# Altium PCB PCI Express_16765X11115_36PIN_Half length.PCBDOC
Units mm, origin at the board's own origin, x right, y up, seen from the top; angles counter-clockwise.
Board outline 167.65 x 111.15 mm, 4 copper layers (TopLayer, InternalPlane1, InternalPlane2, BottomLayer); 1 components, 21 nets, 38 pads, 0 vias.
Unrouted connection lines stored in the file: 14.
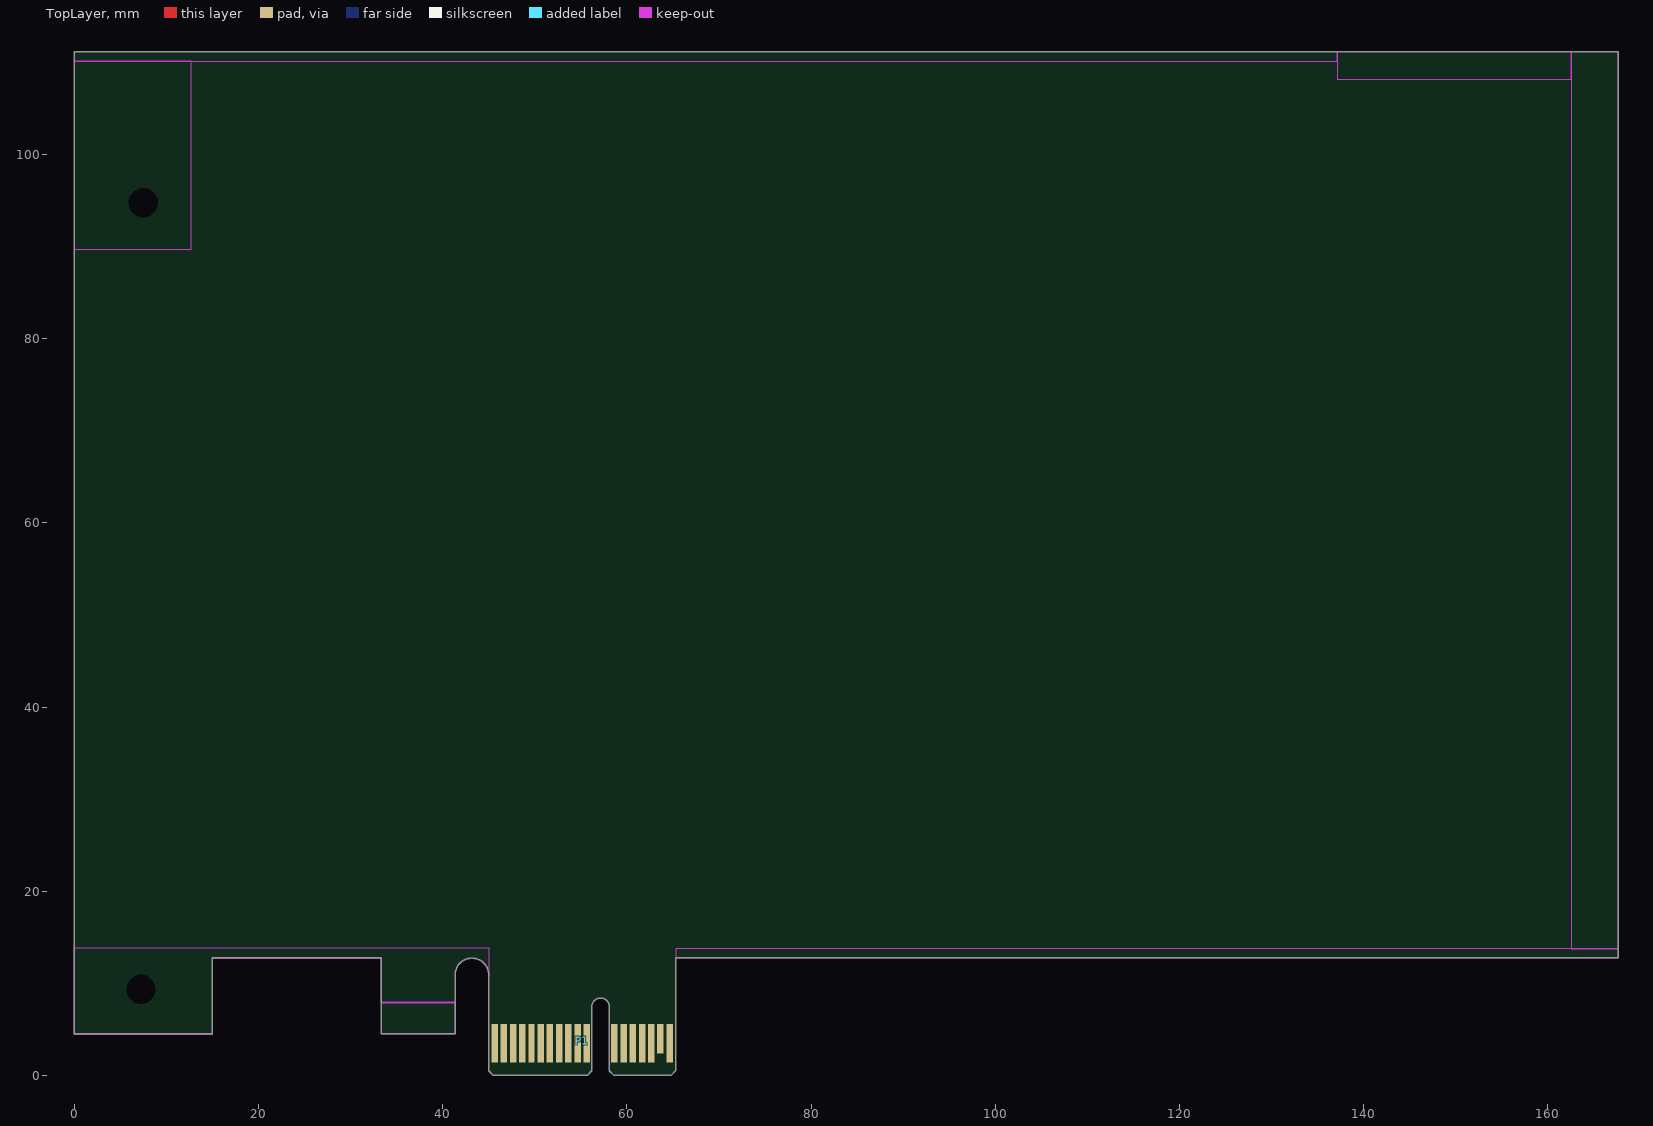
[diagram p0: TopLayer view]
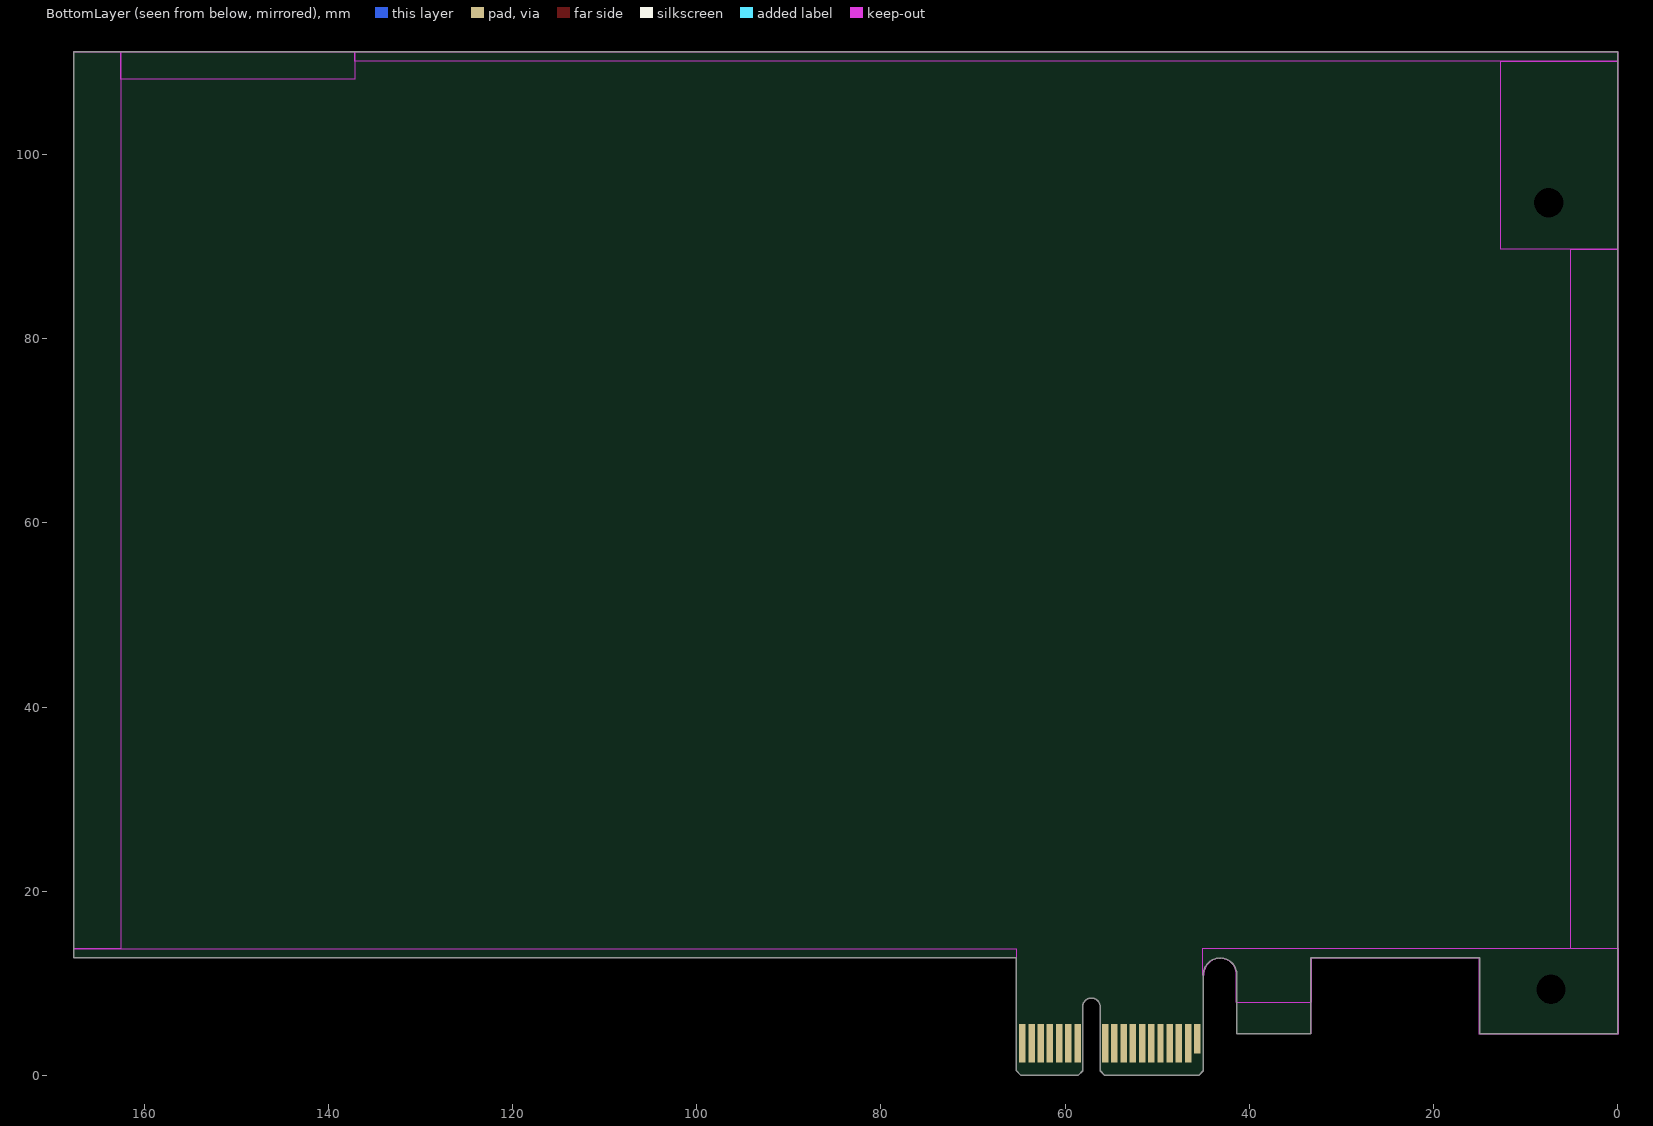
[diagram p1: BottomLayer view, seen from below]
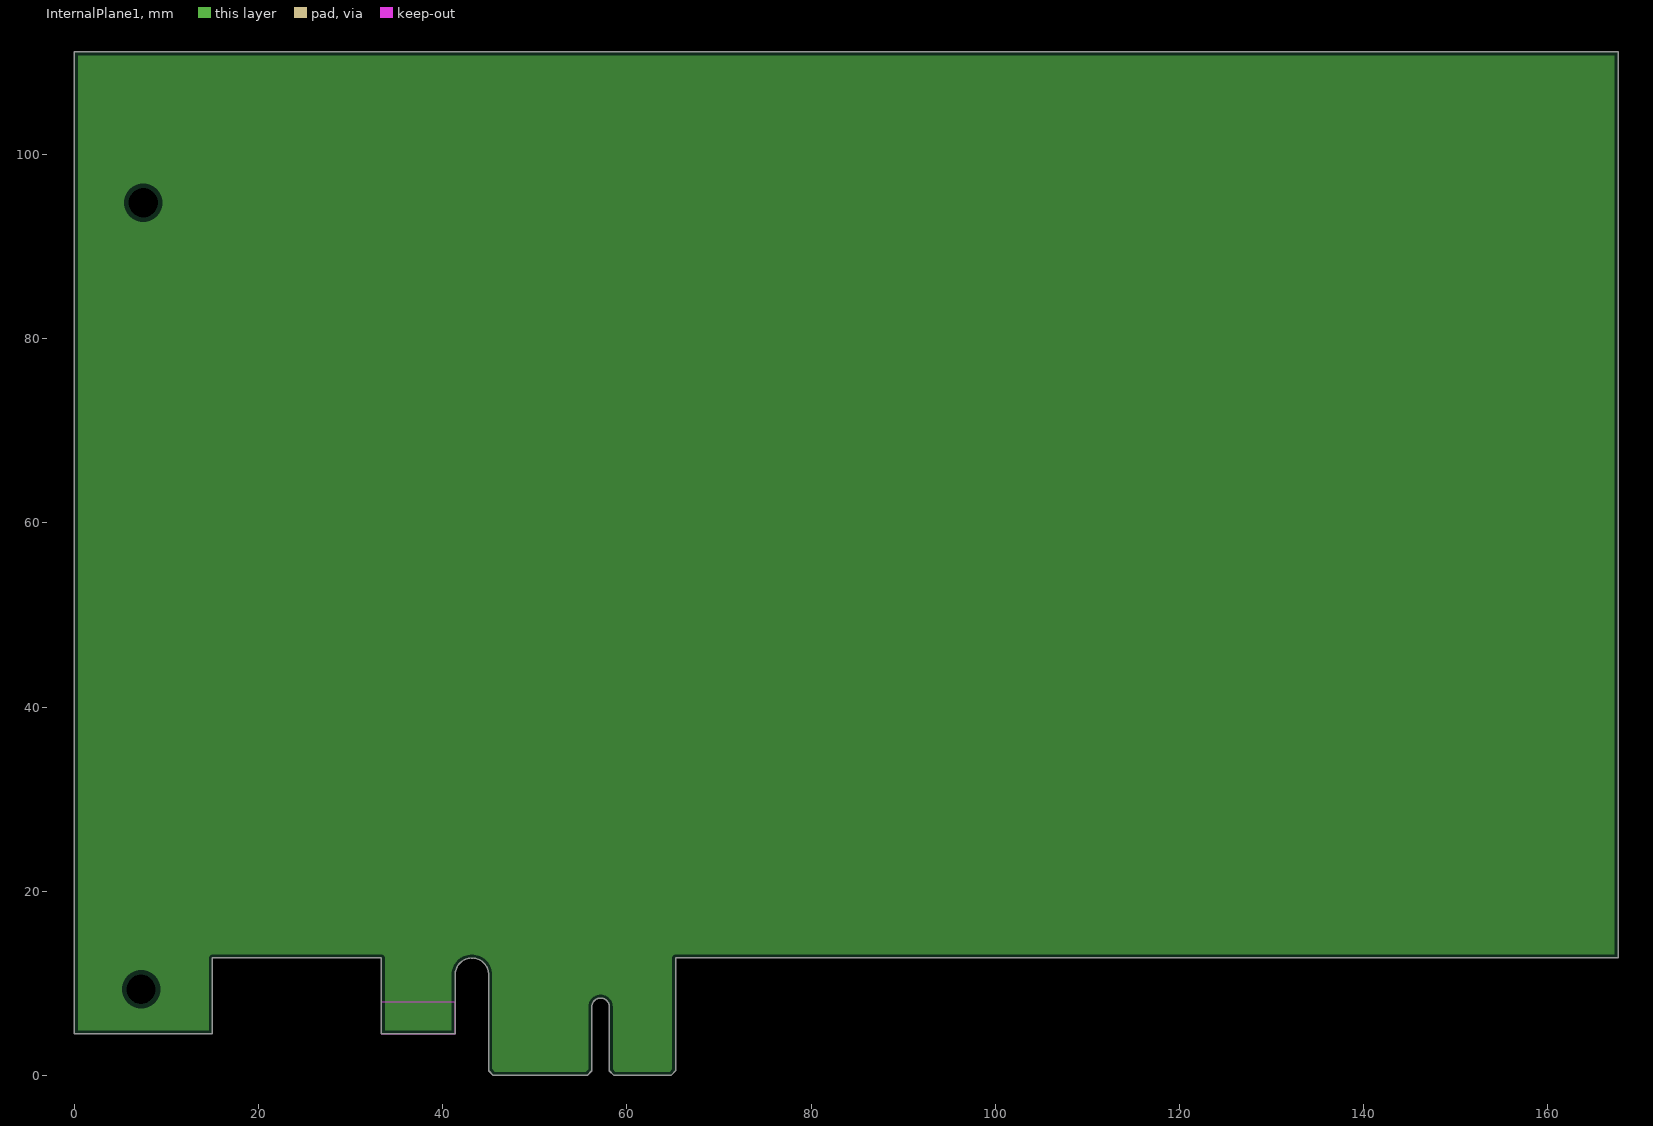
[diagram p2: InternalPlane1, clearances drawn from the general rule]
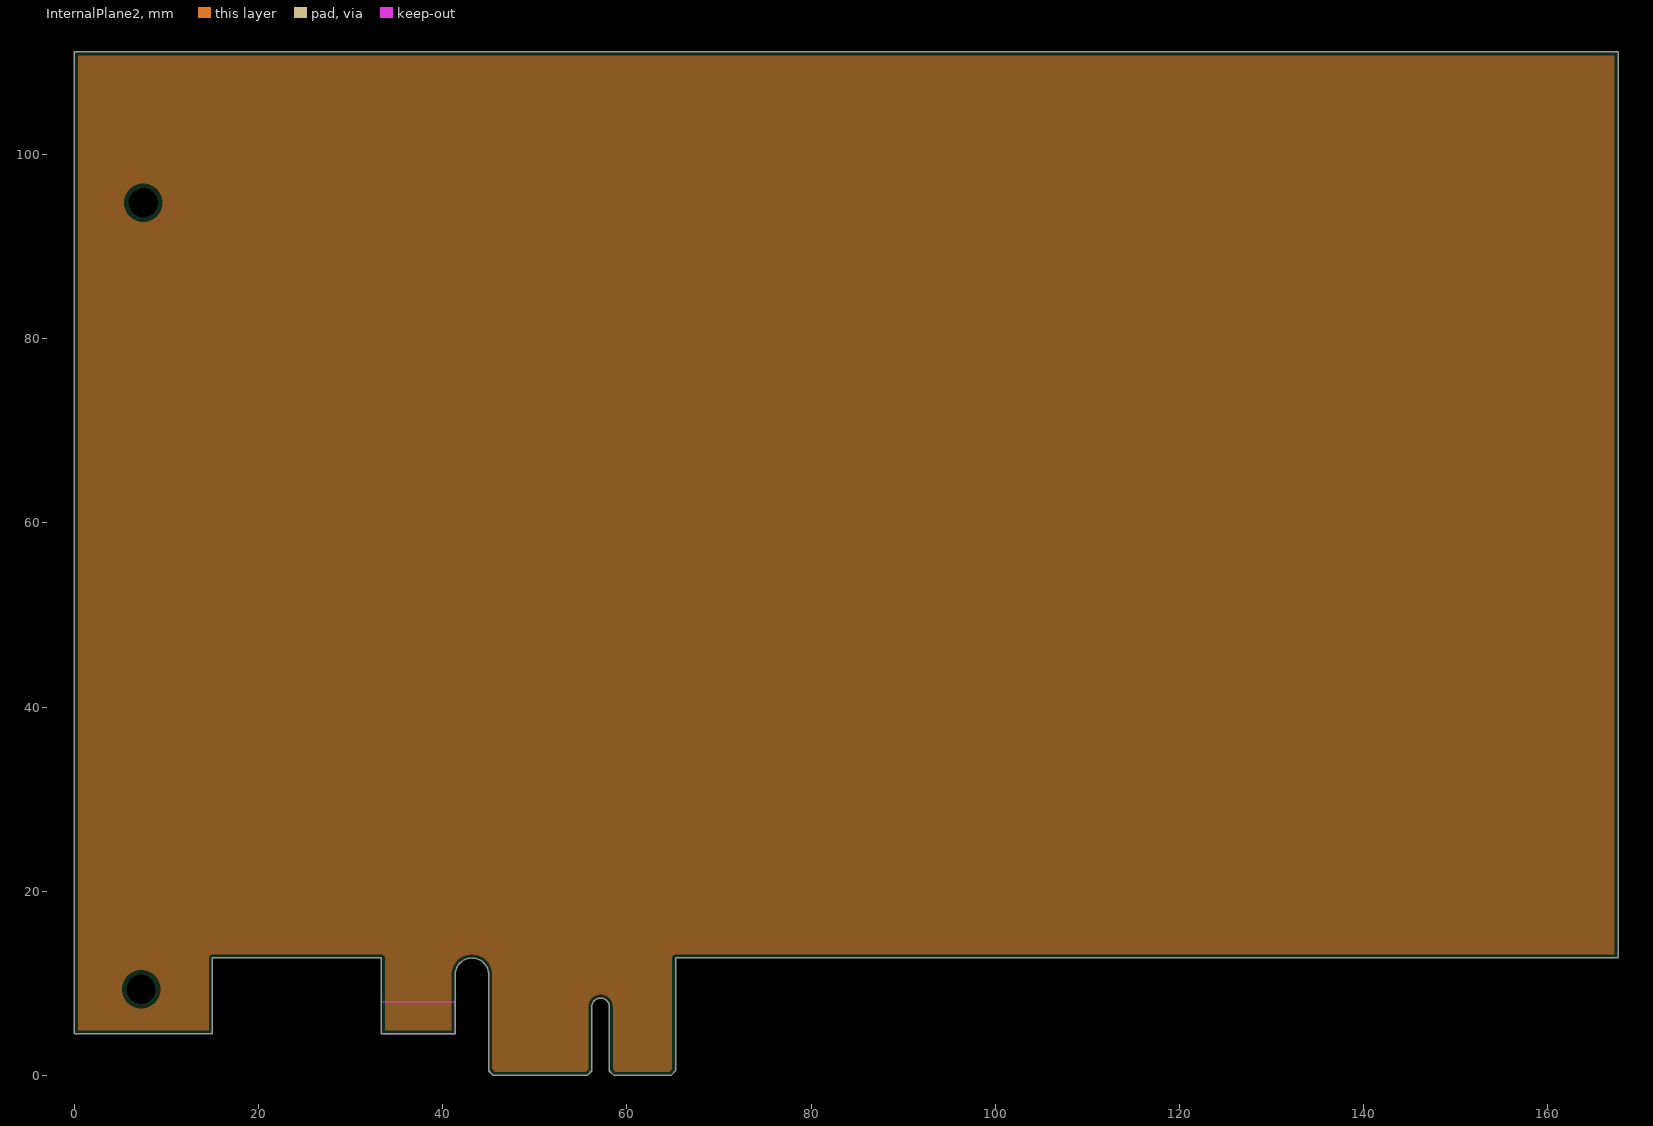
[diagram p3: InternalPlane2, clearances drawn from the general rule]

## Layer stack, top to bottom
TopLayer: signal copper 0.0178
Dielectric: core 0.32, FR-4, Dk 4.8
InternalPlane1: plane copper 0.0356
Dielectric: prepreg 0.32, FR-4, Dk 4.8
InternalPlane2: plane copper 0.0356
Dielectric: core 0.32, FR-4, Dk 4.8
BottomLayer: signal copper 0.0178

## Board outline
0,4.5 15,4.5 15,12.75 33.35,12.75 33.35,4.5 41.35,4.5 41.35,10.925 cw(c43.175,10.925) 45,10.925 45,0.5 45.5,0 55.7,0 56.2,0.5 56.2,7.45 cw(c57.15,7.45) 58.1,7.45 58.1,0.5 58.6,0 64.8,0 65.3,0.5 65.3,12.75 167.65,12.75 167.65,111.15 0,111.15

## Design rules (kind name [scope] priority, off if disabled: settings)
Clearance [All] p1: gap=0.254
DiffPairsRouting [All] p1: maxlimit=0.254 minlimit=0.254 mostfreqgap=0.254 maxuncoupledlength=12.7
FabricationTestPointUsage TestPointUsage [All] p1: valid=0 allowmultiple=FALSE
FabricationTestpoint Testpoint [All] p1: side=3 testpointundercomponent=TRUE minsize=1.016 maxsize=2.54 preferedsize=1.524 minholesize=0.508 maxholesize=1.016 preferedholesize=0.813 testpointgrid=0.025 allowsidetop=TRUE allowsidebottom=TRUE usegrid=TRUE gridtolerance=0
Height "PCI Express, Page 84, \"Component Height Constraints\" for solder side" [OnBottomLayer] p1: minheight=0 maxheight=2.67 prefheight=2.67
Height "PCI Express, Page 84, \"Component Height Constraints\" for component side" [OnTopLayer] p2: minheight=0 maxheight=14.47 prefheight=14.47
PlaneClearance [All] p1: clearance=0.5
PlaneConnect [All] p1: planeconnectstyle=Relief reliefexpansion=0.508 reliefentries=4 reliefconductorwidth=0.254 reliefairgap=0.254
PolygonConnect [All] p1: connectstyle=Relief reliefconductorwidth=0.254 reliefentries=4 polygonreliefangle="90 Angle"
RoomDefinition "Component Free Area" [InAnyComponent] p1: confinementstyle=ConfineOut formatcopy=TRUE lockcomponents=FALSE outline 142.05,13.75 142.05,14.1 150.2,14.1 150.2,16.1 155.45,16.1 155.45,13.75
RoutingVias [All] p1: holewidth=0.711 width=1.27 viastyle="Through Hole" minholewidth=0.711 minwidth=1.27 maxholewidth=0.711 maxwidth=1.27
SilkscreenOverComponentPads [All] p1: minsilkscreentomaskgap=0.254
SolderMaskExpansion [All] p1: expansion=0
Width [All] p1: maxlimit=0.254 minlimit=0.254 preferedwidth=0.254
21 further rules are at their usual default settings.

## Classes and differential pairs
net class JTAG[1..5]: JTAG1 JTAG2 JTAG3 JTAG4 JTAG5
differential pair PER0: +PER0_P -PER0_N
differential pair PET0: +PET0_P -PET0_N

## Components (designator, comment, footprint, x,y, rotation, side; value= is the part's Value field where it differs from the comment)
P1 "PCIeX1-GF-2D-1000-1K-O36" PCIeX1-GF-2D-1000-1K-O36 55.15,3.5 r0 top locked

## Footprints (in the part's own frame and the unit in brackets; to place one, negate y for a bottom-side part, rotate by r counter-clockwise, add the part's x,y. Pads: shape width x height; smd on the part's side, far side on the other; paste and mask are expansions set on the pad)
PCIeX1-GF-2D-1000-1K-O36 [mm] "Golden finger, PCIeX1, Dual, Opposite, Pitch 1mm, 36-Position"
  rect 0.7x3.2 smd far side paste-1: A1(-9.5,0.5)
  rect 0.7x4.2 smd far side paste-1: A2(-8.5,0) A3(-7.5,0) A4(-6.5,0) A5(-5.5,0) A6(-4.5,0) A7(-3.5,0) A8(-2.5,0) A9(-1.5,0) A10(-0.5,0) A11(0.5,0) A12(3.5,0) A13(4.5,0) A14(5.5,0) A15(6.5,0) A16(7.5,0) A17(8.5,0) A18(9.5,0)
  rect 0.7x4.2 smd paste-1: B1(-9.5,0) B2(-8.5,0) B3(-7.5,0) B4(-6.5,0) B5(-5.5,0) B6(-4.5,0) B7(-3.5,0) B8(-2.5,0) B9(-1.5,0) B10(-0.5,0) B11(0.5,0) B12(3.5,0) B13(4.5,0) B14(5.5,0) B15(6.5,0) B16(7.5,0) B18(9.5,0)
  rect 0.7x3.2 smd paste-1: B17(8.5,0.5)

## Part data
P1: library part CMP-0001-00030-2, "Golden finger, PCIeX1, Dual, Opposite, Pitch 1mm, 36-Position"

## Free pads (board coordinates)
  round 2.88 hole 3.18 unplated: MH1(7.25,9.35) MH2(7.5,94.75)

## Nets (pads, with @x,y where several pads share a name; then routed paths per layer and width w, separated by ;. In a path a pad name is that pad's centre, name@x,y a point inside that pad or via, vN(x,y) a via of type N, cw(c..) or ccw(c..) an arc to the next point about the centre after c; other vN are vias at no path point)
3.3VAUX: P1.B10
+3.3V: P1.A9 P1.A10 P1.B8
+12V: P1.A2 P1.A3 P1.B1 P1.B2 P1.B3
GND: P1.A4 P1.A12 P1.A15 P1.A18 P1.B4 P1.B7 P1.B13 P1.B16 P1.B18
JTAG1: P1.B9
JTAG2: P1.A5
JTAG3: P1.A6
JTAG4: P1.A7
JTAG5: P1.A8
PER0_N: P1.A17
PER0_P: P1.A16
PERST#: P1.A11
PET0_N: P1.B15
PET0_P: P1.B14
PRSNT1#: P1.A1
PRSNT2#: P1.B17
REFCLK+: P1.A13
REFCLK-: P1.A14
SMCLK: P1.B5
SMDAT: P1.B6
WAKE#: P1.B11
pads on no net: P1.B12

## Polygon pours and split planes (outlines as drawn)
no net on InternalPlane1 (split plane): 167.267,13.133 65.3,13.133 65.225,13.125 65.153,13.104 65.087,13.068 65.029,13.021 64.982,12.963 64.946,12.897 64.925,12.825 64.917,12.75 64.917,0.659 64.641,0.383 58.759,0.383 58.483,0.659 58.483,7.45 58.475,7.599 58.45,7.747 58.408,7.89 58.351,8.028 58.279,8.159 58.192,8.281 58.093,8.393 57.981,8.492 57.859,8.579 57.728,8.651 57.59,8.708 57.447,8.75 57.299,8.775 57.15,8.783 57.001,8.775 56.853,8.75 56.71,8.708 56.572,8.651 56.441,8.579 56.319,8.492 56.207,8.393 56.108,8.281 56.021,8.159 55.949,8.028 55.892,7.89 55.85,7.747 55.825,7.599 55.817,7.45 55.817,0.659 55.541,0.383 45.659,0.383 45.383,0.659 45.383,10.925 45.375,11.117 45.35,11.308 45.308,11.496 45.25,11.68 45.176,11.858 45.087,12.029 44.984,12.192 44.867,12.344 44.736,12.486 44.594,12.617 44.442,12.734 44.279,12.837 44.108,12.926 43.93,13 43.746,13.058 43.558,13.1 43.367,13.125 43.175,13.133 42.983,13.125 42.792,13.1 42.604,13.058 42.42,13 42.242,12.926 42.071,12.837 41.908,12.734 41.756,12.617 41.614,12.486 41.483,12.344 41.366,12.192 41.263,12.029 41.174,11.858 41.1,11.68 41.042,11.496 41,11.308 40.975,11.117 40.967,10.925 40.967,4.883 33.733,4.883 33.733,12.75 33.725,12.825 33.704,12.897 33.668,12.963 33.621,13.021 33.563,13.068 33.497,13.104 33.425,13.125 33.35,13.133 15,13.133 14.925,13.125 14.853,13.104 14.787,13.068 14.729,13.021 14.682,12.963 14.646,12.897 14.625,12.825 14.617,12.75 14.617,4.883 0.383,4.883 0.383,110.767 167.267,110.767
no net on InternalPlane2 (split plane): 167.267,13.133 65.3,13.133 65.225,13.125 65.153,13.104 65.087,13.068 65.029,13.021 64.982,12.963 64.946,12.897 64.925,12.825 64.917,12.75 64.917,0.659 64.641,0.383 58.759,0.383 58.483,0.659 58.483,7.45 58.475,7.599 58.45,7.747 58.408,7.89 58.351,8.028 58.279,8.159 58.192,8.281 58.093,8.393 57.981,8.492 57.859,8.579 57.728,8.651 57.59,8.708 57.447,8.75 57.299,8.775 57.15,8.783 57.001,8.775 56.853,8.75 56.71,8.708 56.572,8.651 56.441,8.579 56.319,8.492 56.207,8.393 56.108,8.281 56.021,8.159 55.949,8.028 55.892,7.89 55.85,7.747 55.825,7.599 55.817,7.45 55.817,0.659 55.541,0.383 45.659,0.383 45.383,0.659 45.383,10.925 45.375,11.117 45.35,11.308 45.308,11.496 45.25,11.68 45.176,11.858 45.087,12.029 44.984,12.192 44.867,12.344 44.736,12.486 44.594,12.617 44.442,12.734 44.279,12.837 44.108,12.926 43.93,13 43.746,13.058 43.558,13.1 43.367,13.125 43.175,13.133 42.983,13.125 42.792,13.1 42.604,13.058 42.42,13 42.242,12.926 42.071,12.837 41.908,12.734 41.756,12.617 41.614,12.486 41.483,12.344 41.366,12.192 41.263,12.029 41.174,11.858 41.1,11.68 41.042,11.496 41,11.308 40.975,11.117 40.967,10.925 40.967,4.883 33.733,4.883 33.733,12.75 33.725,12.825 33.704,12.897 33.668,12.963 33.621,13.021 33.563,13.068 33.497,13.104 33.425,13.125 33.35,13.133 15,13.133 14.925,13.125 14.853,13.104 14.787,13.068 14.729,13.021 14.682,12.963 14.646,12.897 14.625,12.825 14.617,12.75 14.617,4.883 0.383,4.883 0.383,110.767 167.267,110.767

## Keep-outs
TopLayer:
  rectangle: 0,89.7 12.7,110.15
  rectangle: 0,110.15 137.15,111.15
  rectangle: 137.15,108.15 162.57,111.15
  rectangle: 162.57,13.75 167.65,111.15
  rectangle: 65.3,12.75 167.65,13.75
  region: 0,4.45 15,4.45 ccw(c15,4.5) 15.05,4.5 15.05,12.7 33.3,12.7 33.3,7.95 ccw(c33.35,7.95) 33.35,7.9 41.35,7.9 ccw(c41.35,7.95) 41.4,7.95 ccw(c41.35,7.95) 41.4,7.951 41.4,10.925 cw(c43.175,10.925) 44.95,10.925 ccw(c45,10.925) 45.05,10.925 45.05,13.75 ccw(c45,13.75) 45,13.8 0,13.8 ccw(c0,13.75) -0.05,13.75 -0.05,4.5 ccw(c0,4.5)
BottomLayer:
  rectangle: 65.3,12.75 167.65,13.75
  rectangle: 162.57,13.75 167.65,111.15
  rectangle: 137.15,108.15 162.57,111.15
  rectangle: 0,110.15 137.15,111.15
  rectangle: 0,89.7 12.7,110.15
  rectangle: 0,13.75 5.08,89.7
  region: 0,4.45 15,4.45 ccw(c15,4.5) 15.05,4.5 15.05,12.7 33.3,12.7 33.3,7.95 ccw(c33.35,7.95) 33.35,7.9 41.35,7.9 ccw(c41.35,7.95) 41.4,7.95 ccw(c41.35,7.95) 41.4,7.951 41.4,10.925 cw(c43.175,10.925) 44.95,10.925 ccw(c45,10.925) 45.05,10.925 45.05,13.75 ccw(c45,13.75) 45,13.8 0,13.8 ccw(c0,13.75) -0.05,13.75 -0.05,4.5 ccw(c0,4.5)
TopSolder:
  rectangle: 33.35,4.5 41.35,7.95
BottomSolder:
  rectangle: 33.35,4.5 41.35,7.95
KeepOutLayer:
  rectangle: 33.35,4.5 41.35,7.95

## Silkscreen, mask and mechanical layers (free items; w line width, h text height)
PCI-SIG Outline:
  the board outline again, w0.1
PCI-SIG Notes:
  text "- Nominal values used, dimensions in mm" at 172,18.75 h1.52
  text "- The mounting holes and keep-out areas around them are only required when the I/O bracket is mounted on the card directly" at 172,17.5 h1.52
  text "- Component height rule and clearance rule derived from PCI_Express_CEM_r2.0.pdf, Page 84." at 172,16.25 h1.52
  text "- Stackup is not specified in PCI_Express_CEM_r2.0.pdf, nor implemented in this template." at 172,15 h1.52
Mechanical7:
  lines w0.1: 0,4.5 0,13.75 45,13.75 45,10.925 ccw(c43.175,10.925) 41.35,10.925 41.35,7.95 33.35,7.95 33.35,12.75 15,12.75 15,4.5 0,4.5
DrillDrawing:
  text ".LEGEND" at 225.25,59.352 h1
  text "Drilling Details." at 225.25,57.523 h1

## Dimensions
0,0 to 0,111.15 on PCI-SIG Dimensions
0,4.5 to 0,111.15 on PCI-SIG Dimensions
0,111.15 to 167.65,111.15 on PCI-SIG Dimensions